# Altium PCB Sensei Control Board.PcbDoc (part 2 of 2)
Units mil, origin at the board's own origin, x right, y up, seen from the top; angles counter-clockwise.
Board outline 2310 x 2685 mil, 4 copper layers (Top Layer, Int1 (GND), Int2 (PWR), Bottom Layer), stack 61.811 mil thick; 49 components, 37 nets, 153 pads, 35 vias.
Unrouted connection lines stored in the file: 1.
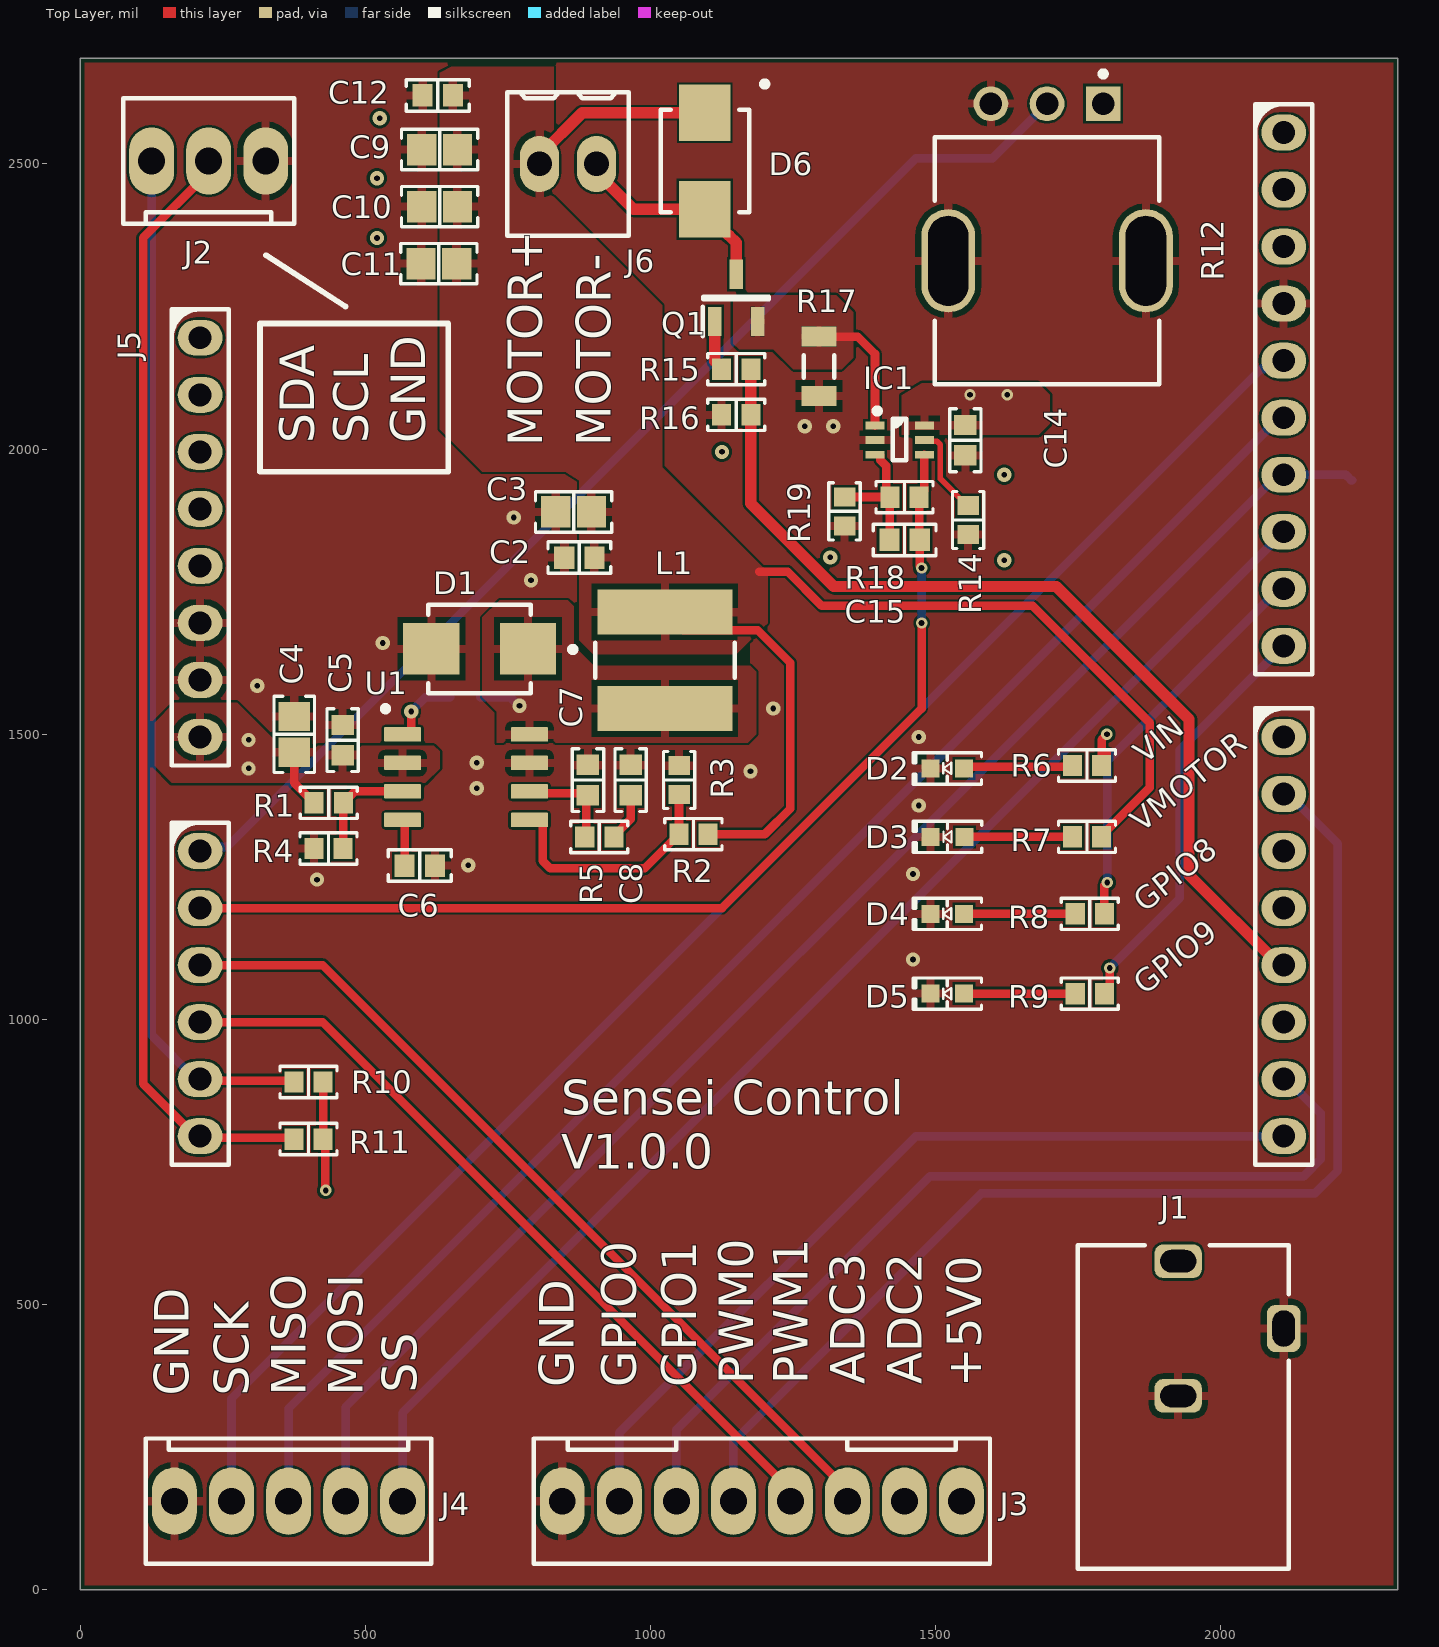
[diagram p0: Top Layer view]

## Via types
v1: diameter 25, hole 10, Top Layer to Bottom Layer, 27 vias
v2: diameter 20, hole 10, Top Layer to Bottom Layer, 8 vias

## Nets (pads, with @x,y where several pads share a name; then routed paths per layer and width w, separated by ;. In a path a pad name is that pad's centre, name@x,y a point inside that pad or via, vN(x,y) a via of type N, cw(c..) or ccw(c..) an arc to the next point about the centre after c; other vN are vias at no path point) (continued)
BOOT: (continued)
  Top Layer w15: U1.1 574.7,1499.65 580,1504.94 v1(580,1539.65)
  Bottom Layer w15: v1(580,1539.65) 605,1564.65 C1.2
COMP: C7.2 R5.2 U1.6 | length 181
  Top Layer w15: U1.6 790.73,1396.36 886.71,1396.36 C7.2 887.2,1390.28 887.2,1322.44 R5.2
EN: R1.1 R4.2 U1.3 | length 193.5
  Top Layer w15: R4.2 460.89,1299.94 460.89,1379.35 R1.1 461.18,1381.61 470.41,1390.85 472.38,1390.85 481.18,1399.65 U1.3
GND: C2.1 C3.1 C4.1 C5.1 C6.1 C7.1 C8.1 C9.1 C10.1 C11.1 C12.1 C14.1 D1.2 D2.2 D3.2 D4.2 D5.2 IC1.2 J1.2 J1.3 J2.3 J3.8 J4.5 J5.6 J5.7 J5.29 R3.1 R4.1 R12.3 R12.4 R12.5 R13.2 R14.2 R16.1 R17.1 R19.2 U1.7
  other v1: 1460,1105 415,1245 1460,1255 680,1270 1470,1375 695,1405 1175,1435 695,1450 1470,1495 1215,1545 310,1585 530,1660 790,1770 760,1880 1270,2040 1320,2040
GPIO0: J3.7 J5.15 | length 1500.4
  Bottom Layer w15: J3.7 945,275 1465.08,795.08 J5.15
GPIO1: J3.6 J5.16 | length 1621.6
  Bottom Layer w15: J3.6 1045,280 1490,725 2145,725 2175,755 2175,835 2114.92,895.08 J5.16
GPIO3_PWM0: J5.18 R15.1 R16.2 | length 1665
  Top Layer w15: J5.18@2102.13,1095.08 J5.18
  Top Layer w20: R15.1 R16.2 1175.59,1904.41 1320.98,1759.02 1710.98,1759.02 1943.97,1526.03 1943.97,1253.23 J5.18@2102.13,1095.08
GPIO6_PWM2: J3.5 J5.21 | length 2065.8
  Bottom Layer w15: J3.5 1145,260 1580,695 2165,695 2205,735 2205,1307.95 2117.87,1395.08 J5.21
GPIO8: J5.23 R9.1 | length 740.2
  Top Layer w15: R9.1 1805,1054.41 v2(1805,1090)
  Bottom Layer w15: v2(1805,1090) 1927.94,1212.94 1927.94,1472.86 J5.23
GPIO9: J5.24 R8.1 | length 704.8
  Top Layer w15: R8.1 1795.59,1234.78 v2(1800.77,1239.96)
  Bottom Layer w15: v2(1800.77,1239.96) 1800.77,1453.56 2102.13,1754.92 J5.24
MISO: J4.3 J5.27 | length 2627.3
  Bottom Layer w15: J4.3 365,317.8 2102.13,2054.92 J5.27
MOSI: J4.2 J5.26 R13.1 | length 2611.1
  Bottom Layer w15: J4.2 465,320 2057.59,1912.59 2099.92,1954.92 J5.26 2218.7,1954.92 2228.03,1945.59 R13.1
NetC8_2: C8.2 R5.1 | length 85.6
  Top Layer w15: R5.1 935.59,1321.61 965,1351.02 C8.2
NetC15_1: C15.1 IC1.3 R18.1 R19.1 | length 235.9
  Top Layer w15: R19.1 1340.41,1915.89 1413.14,1915.89 1419.23,1915.89 R18.1 ; IC1.3@1402.62,1989.39 1402.62,1980.77 1413.17,1970.22 1413.17,1921.95 R18.1 ; C15.1 1419.04,1841.08 1419.04,1915.1 R18.1
NetD2_1: D2.1 R6.2 | length 192
  Top Layer w15: D2.1 1552.03,1442.5 1736.91,1442.5 R6.2
NetD3_1: D3.1 R7.2 | length 191.4
  Top Layer w15: D3.1 R7.2 R7.2@1739.41,1318.03
NetD4_1: D4.1 R8.2 | length 194.9
  Top Layer w15: D4.1 R8.2
NetD5_1: D5.1 R9.2 | length 194.9
  Top Layer w15: D5.1 R9.2
NetD6_2: D6.2 J6.2 Q1.3 | length 368.7
  Top Layer w20: J6.2 905,2485.24 969.88,2420.35 D6.2 1095,2416.42 1137.77,2373.64 1138.28,2373.64 1150,2361.93 Q1.3
NetIC1_1: IC1.1 Q1.2 R17.2 | length 236.5
  Top Layer w15: R17.2 1362.83,2197.17 1393.39,2166.61 IC1.1
NetQ1_1: Q1.1 R15.2 | length 88.6
  Top Layer w20: Q1.1 1112.6,2153.78 1124.41,2141.97 R15.2
S\H\D\N\: IC1.5 R14.1 | length 159.1
  Top Layer w10: IC1.5 1481.89,2013.7 1501.97,2013.7 1507.83,2007.84 1507.83,1948.08 1554.72,1901.18 R14.1
SCK: J4.4 J5.28 | length 2778.8
  Bottom Layer w15: J4.4 265,335 2070.34,2140.34 2074.56,2140.34 2089.14,2154.92 J5.28
SCL: J2.2 J5.14 R11.2 | length 1970.1
  Top Layer w15: J2.2 225,2485.32 110,2370.32 110,887.2 202.13,795.08 J5.14 212.54,792.54 371.87,792.54 R11.2
SDA: J2.1 J5.13 R10.2 | length 1816.3
  Top Layer w15: J5.13 212.54,892.54 371.87,892.54 R10.2
  Bottom Layer w15: J2.1 125,972.2 202.13,895.08 J5.13
SS: J4.1 J5.25 | length 2339.9
  Bottom Layer w15: J4.1 565,310 1952.92,1697.92 1953,1697.92 J5.25
SS_P: C6.2 U1.4 | length 86.3
  Top Layer w10: C6.2@565,1273.07 C6.2
  Top Layer w15: U1.4 568.43,1346.22 C6.2
V_MOTOR: C2.2 C3.2 C9.2 C10.2 C11.2 C12.2 D6.1 J6.1 L1.2 R2.2 R7.1 | length 2040.9
  Top Layer w15: L1.2 1056.87,1682.42 1187.58,1682.42 1245,1625 1245,1369.65 1200,1324.65 R2.2 ; 1190,1785 1240,1785 1300,1725 1670,1725 1875,1520 1875,1406.38 1790.59,1321.97 R7.1
  Top Layer w20: J6.1 805,2514.76 879.88,2589.65 D6.1
V_SENSE: R2.1 R3.2 U1.5 | length 431.7
  Top Layer w15: U1.5 805.21,1349.65 810.5,1344.35 810.5,1277.93 823.79,1264.65 989.41,1264.65 1038.21,1313.44 1040.18,1313.44 1049.41,1322.68 R2.1 1049.7,1324.94 1049.7,1393.76 R3.2
V_SW: C1.1 D1.1 L1.1 U1.8 | length 74.6
  Bottom Layer w15: C1.1 753.65,1564.65 768.65,1549.65 v1(770,1549.65)
VIN: C4.2 C5.2 J1.1 J5.8 R1.2 R6.1 U1.2 | length 176.4
  Top Layer w15: C4.2 375,1414.65 398.8,1390.85 400.77,1390.85 410,1381.61 R1.2 ; R6.1 1790.59,1490.59 v2(1800,1500) ; R6.1@1799.82,1454.23 1799.82,1467.32 1800,1467.5
  other v1: 295,1440 295,1490
pads on no net: J5.1 J5.2 J5.3 J5.17 J5.19 J5.20 J5.22 J5.30 J5.31 J5.32
copper on no net:
  other v1: 1620,1805 1315,1810 1620,1955 1125,1995 520,2370 520,2475 525,2580

## Polygon pours and split planes (outlines as drawn)
V_MOTOR on Top Layer "V_MOTOR_L01_P007" (solid, pour order 7): 1205,1744.22 1159.58,1789.65 1000,1789.65 965,1824.65 965,1888.58 850.35,1960 705,1960 630,2035 630,2275 780,2275 825,2320 825,2447.46 1020,2252.46 1020,1968.47 1205,1783.9
V_MOTOR on Top Layer "V_MOTOR_L01_P003" (solid, pour order 3): 1150,1639.65 1205,1694.65 1205,1750.75 1166.11,1789.65 1000,1789.65 965,1824.65 965,1934.65 950,1949.65 880,1949.65 875,1944.65 875,1744.65 875,1664.65 900,1639.65
GND on Top Layer "GND_L01_P018" (solid, pour order 18): 0,2685 5,2690 2315,2690 2315,5 2310,0 2305,5 0,5
5V0 on Top Layer "5V0_L01_P011" (solid, pour order 11): 1475,2115 1680,2115 1700,2095 1700,2044.14 1680.7,2024.85 1440,2024.85 1440,2094
VIN on Top Layer "VIN_L01_P000" (solid, pour order 0): 275,1555 350.07,1479.93 519.9,1479.75 520,1479.65 620,1479.65 630,1469.65 630,1439.65 604.8,1414.44 160.13,1414.44 130,1445 130,1520 165,1555
GND on Top Layer "GND_L01_P005" (solid, pour order 5): 850,1949.65 860,1945.03 860,1744.65 720,1744.65 694.57,1719.22 694.57,1505.07 720,1479.65 1105,1479.65 1115,1469.65 1115,1429.65 1100,1414.65 715,1414.65 645,1484.65 570,1559.65 550,1559.65 520,1589.65 520,1765 704.65,1949.65
NetIC1_1 on Top Layer "NETIC1_1_L01_P010" (solid, pour order 10): 1145,2260 1155,2270 1325,2270 1355,2240 1355,2160 1335,2140 1250,2140 1215,2175 1155,2175 1145,2185
V_MOTOR on Top Layer "V_MOTOR_L01_P006" (solid, pour order 6): 650,2670 830,2670 830,2280 825,2275 630,2275 630,2660
V_SW on Top Layer "V_SW_L01_P001" (solid, pour order 1): 855,1734.65 865,1724.65 865,1654.64 900,1619.65 1175,1619.65 1185,1609.65 1185,1499.65 1170,1484.65 860,1484.65 730,1484.65 730,1539.65 705,1564.65 705,1704.65 735,1734.65
GND on Int2 (PWR) "GND_L03_P020" (solid, pour order 20): 0,2685 5,2690 2315,2690 2315,5 2310,0 2305,5 0,5
VIN on Int2 (PWR) "VIN_L03_P014" (solid, pour order 14): 1870,505 1985,505 2010,530 2010,1460 1920,1550 260,1550 135,1550 120,1535 120,1420 140,1400 270,1400 1765,1400 1835,1330 1835,530
5V0 on Int2 (PWR) "5V0_L03_P017" (solid, pour order 17): 585,1745 855,2015 1750,2015 1815,2080 1815,2420 1865,2470 1865,2655 1850,2670 1750,2670 1735,2655 1735,2190 1665,2120 795,2120 525,1850 125,1850 110,1835 110,1760 125,1745
GND on Bottom Layer "GND_L04_P021" (solid, pour order 21): 0,2675 5,2680 2315,2680 2315,-5 2310,-10 2305,-5 0,-5
GND on Int1 (GND) "GND_L02_P019" (solid, pour order 19): -5,2680 0,2685 2310,2685 2310,0 2305,-5 2300,0 -5,0

## Other copper
Top Layer:
  pour cut-out: 1175,1659.08 1174.98,1659.1 1161.08,1645.2 1161.08,1644.6 1154.96,1644.6 1150.32,1639.97 900,1639.65 900,1619.65 1175,1619.65

## Silkscreen, mask and mechanical layers (free items; w line width, h text height)
Top Overlay:
  lines w10: 325,2340 465,2250 ; 315,1960 645,1960 645,2220 315,2220 315,2195 315,1960
  text "SDA" at 410,2010 h60 r90
  text "SCL" at 505,2010 h60 r90
  text "GND" at 605,2010 h60 r90
  text "MOTOR+" at 810,2005 h60 r90
  text "MOTOR-" at 930,2005 h60 r90
  text "VIN" at 1866.21,1446.25 h40 r38.88
  text "VMOTOR" at 1861.21,1326.25 h40 r38.88
  text "GPIO8" at 1866.21,1186.25 h40 r38.88
  text "GPIO9" at 1866.21,1041.25 h40 r38.88
  text "Sensei Control" at 842.95,833.06 h60
  text "V1.0.0" at 842.95,738.06 h60
  text "PWM0" at 1180,360 h60 r90
  text "PWM1" at 1275,360 h60 r90
  text "ADC3" at 1375,360 h60 r90
  text "ADC2" at 1475,360 h60 r90
  text "GND" at 865,355 h60 r90
  text "GPIO0" at 975,355 h60 r90
  text "GPIO1" at 1080,355 h60 r90
  text "+5V0" at 1580,355 h60 r90
  text "SS" at 590,345 h60 r90
  text "GND" at 190,340 h60 r90
  text "SCK" at 295,340 h60 r90
  text "MISO" at 395,340 h60 r90
  text "MOSI" at 495,340 h60 r90
Mechanical 1:
  drawing of 299 lines, arcs and shapes, not listed
  text "Layer" at 2955,1263.9 h60
  text "Name" at 3364.91,1263.9 h60
  text "Material" at 4294.66,1263.9 h60
  text "Thickness" at 4854.52,1263.9 h60
  text "Constant" at 5504.36,1263.9 h60
  text "Board Layer Stack" at 6074.22,1263.9 h60
  text "Top Overlay" at 3364.91,1143.9 h60
  text "Top Solder" at 3364.91,1023.9 h60
  text "SM-001" at 4294.66,1023.9 h60
  text "0.013mm" at 4854.52,1023.9 h60
  text "3.8" at 5504.36,1023.9 h60
  text "1" at 2955,903.9 h60
  text "Top Layer" at 3364.91,903.9 h60
  text "CF-004" at 4294.66,903.9 h60
  text "0.035mm" at 4854.52,903.9 h60
  text "Dielectric 1" at 3364.91,783.9 h60
  text "2313" at 4294.66,783.9 h60
  text "0.100mm" at 4854.52,783.9 h60
  text "4.05" at 5504.36,783.9 h60
  text "2" at 2955,663.9 h60
  text "Int1 (GND)" at 3364.91,663.9 h60
  text "CF-004" at 4294.66,663.9 h60
  text "0.018mm" at 4854.52,663.9 h60
  text "Dielectric 3" at 3364.91,543.9 h60
  text "FR-4" at 4294.66,543.9 h60
  text "1.265mm" at 4854.52,543.9 h60
  text "4.5" at 5504.36,543.9 h60
  text "3" at 2955,423.9 h60
  text "Int2 (PWR)" at 3364.91,423.9 h60
  text "CF-004" at 4294.66,423.9 h60
  text "0.018mm" at 4854.52,423.9 h60
  text "Dielectric 5" at 3364.91,303.9 h60
  text "2313" at 4294.66,303.9 h60
  text "0.100mm" at 4854.52,303.9 h60
  text "4.05" at 5504.36,303.9 h60
  text "4" at 2955,183.9 h60
  text "Bottom Layer" at 3364.91,183.9 h60
  text "CF-004" at 4294.66,183.9 h60
  text "0.035mm" at 4854.52,183.9 h60
  text "Bottom Solder" at 3364.91,63.9 h60
  text "SM-001" at 4294.66,63.9 h60
  text "0.013mm" at 4854.52,63.9 h60
  text "3.8" at 5504.36,63.9 h60
  text "Bottom Overlay" at 3364.91,-56.1 h60

## Dimensions
2310,0 to 2310,2685 on Mechanical 1
0,0 to 2310,0 on Mechanical 1